# Altium PCB LimeSDR_Mini_1v2_Rounded_panel.PcbDoc
Units mm, origin at the board's own origin, x right, y up, seen from the top; angles counter-clockwise.
Board outline 89.4 x 170.68 mm, 8 copper layers (Top, L2, L3, L4, L5, L6, L7, Bottom), stack 1.129 mm thick; 8 components, 247 nets, 8 pads, 0 vias.
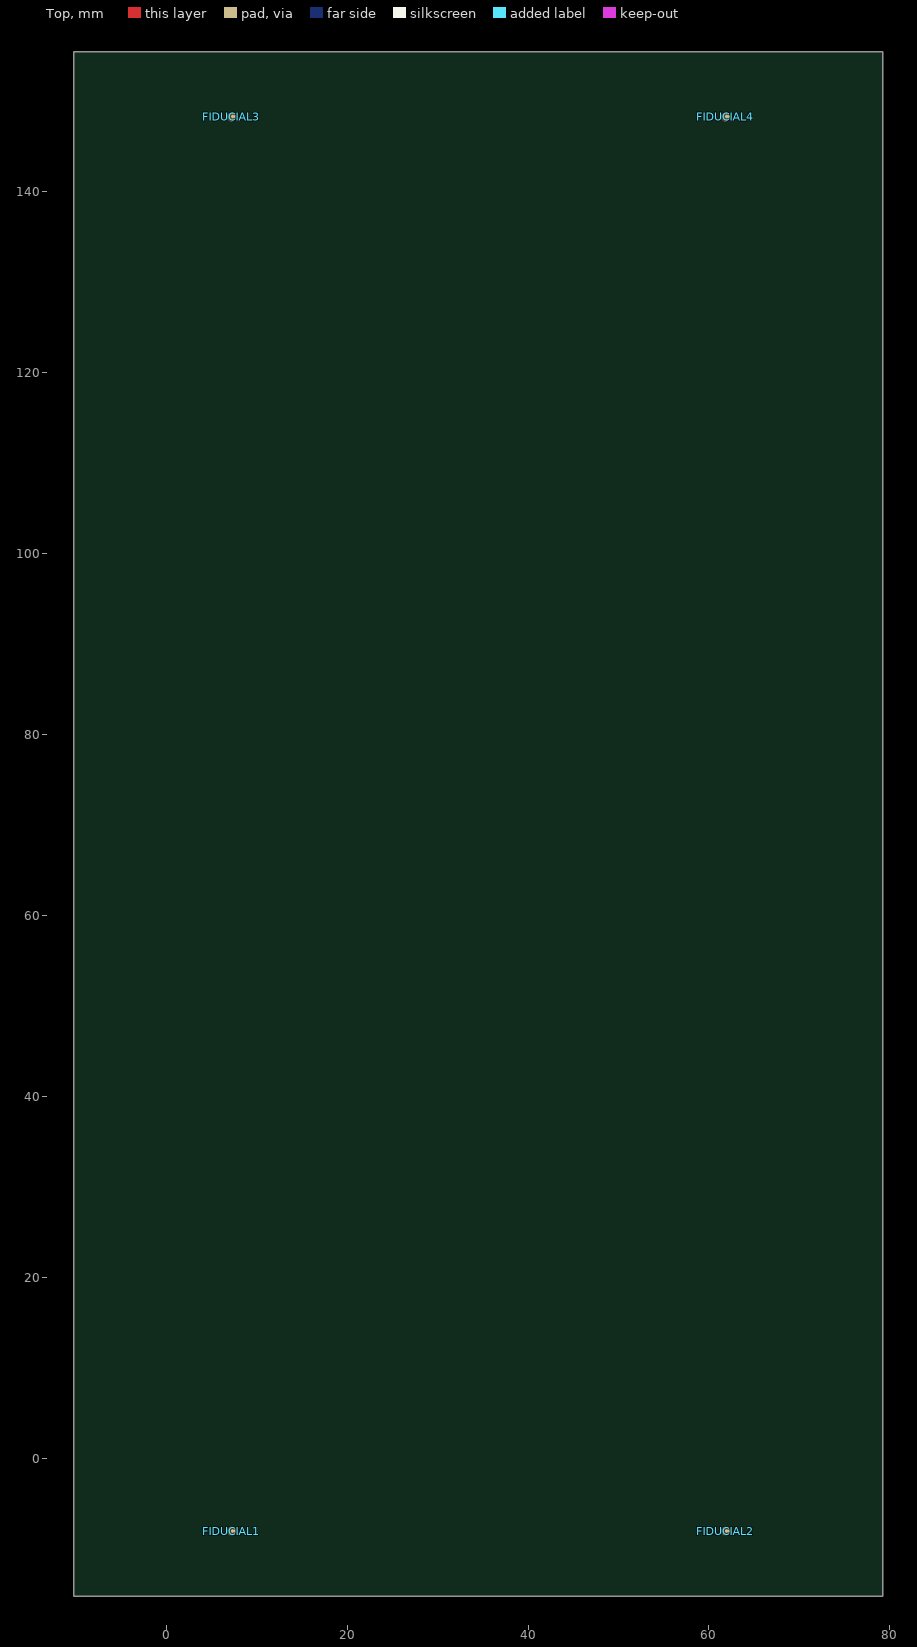
[diagram p0: Top view]
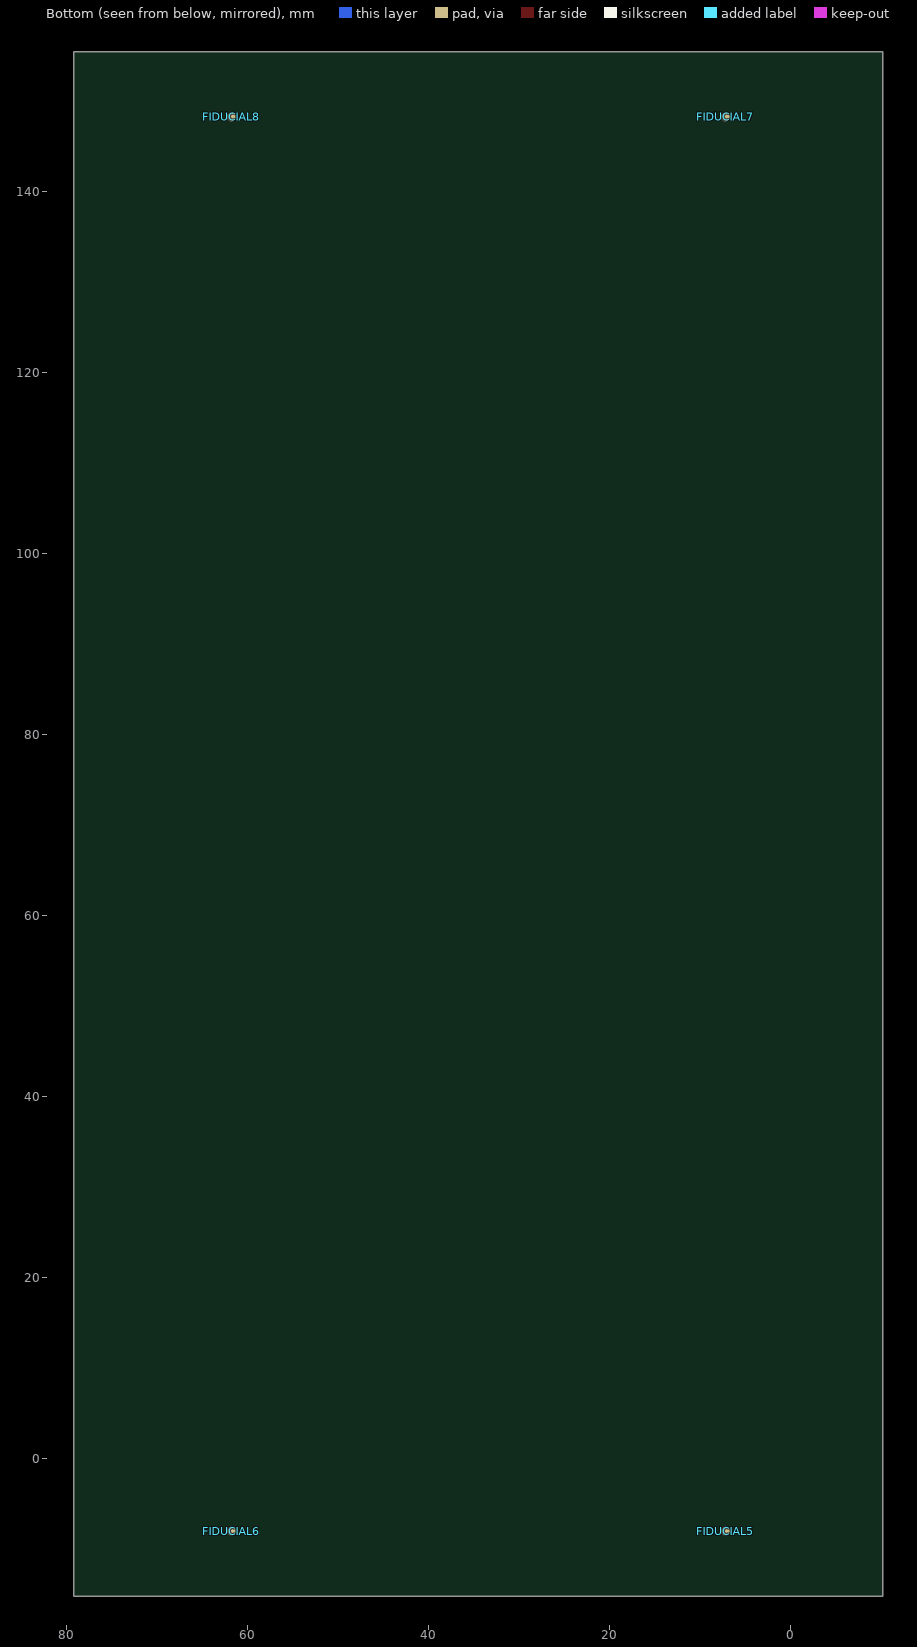
[diagram p1: Bottom view, seen from below]

## Layer stack, top to bottom
TopSolder: solder mask 0.0102, Solder Resist, Dk 3.5
Top: signal copper 0.0178
Dielectric1: core 0.17, FR-4, Dk 4.8
L2: signal copper 0.0356
Dielectric2: prepreg 0.1, FR-4, Dk 4.2
L3: signal copper 0.03
Dielectric3: core 0.1, FR-4, Dk 4.2
L4: signal copper 0.034
Dielectric 4: prepreg 0.1, Dk 4.2
L5: signal copper 0.03
Dielectric 10: core 0.09, Dk 4.2
L6: signal copper 0.03
Dielectric 11: prepreg 0.09, Dk 4.2
L7: signal copper 0.03
Dielectric 8: core 0.254, Dk 4.2
Bottom: signal copper 0.0178
BottomSolder: solder mask 0.0102, Solder Resist, Dk 3.5

## Board outline
-10.2,-15.2 -10.2,155.48 79.2,155.48 79.2,-15.2

## Design rules (kind name [scope] priority, off if disabled: settings)
BoardOutlineClearance [All] p1: gap=0.3
Clearance [All] p1: gap=0.1
ComponentClearance ComponentClearance_RF_CONNECTORS [InComponent('J1') or InComponent('J2') or InComponent('J3') or InComponent('J4') or InComponent('P1') or InComponent('P2') or InComponent('P3') or InComponent('P4') or InComponent('P5') or InComponent('P6') vs InComponent('J1') or InComponent('J2') or InComponent('J3') or InComponent('J4') or InComponent('P1') or InComponent('P2') or InComponent('P3') or InComponent('P4') or InComponent('P5') or InComponent('P6')] p1: gap=-1 collisioncheckmode=3 verticalgap=2540 showdistances=FALSE
ComponentClearance [All] p2: gap=0.01 collisioncheckmode=3 verticalgap=0.254 showdistances=FALSE
DiffPairsRouting DiffPairsRouting_USB3 [InNetClass('FX3_DATA')] p1: maxlimit=0.3 minlimit=0.1 mostfreqgap=0.14 toplayer_minwidth=0.2 toplayer_maxwidth=0.2 toplayer_prefwidth=0.2 midlayer1_minwidth=0.2 midlayer1_maxwidth=0.2 midlayer1_prefwidth=0.2 midlayer2_minwidth=0.2 midlayer2_maxwidth=0.2 midlayer2_prefwidth=0.2 midlayer3_minwidth=0.2 midlayer3_maxwidth=0.2 midlayer3_prefwidth=0.2 midlayer4_minwidth=0.2 midlayer4_maxwidth=0.2 midlayer4_prefwidth=0.2 midlayer7_minwidth=0.2 midlayer7_maxwidth=0.2 midlayer7_prefwidth=0.2 midlayer9_minwidth=0.2 midlayer9_maxwidth=0.2 midlayer9_prefwidth=0.2 bottomlayer_minwidth=0.2 bottomlayer_maxwidth=0.2 bottomlayer_prefwidth=0.2 maxuncoupledlength=12.7
DiffPairsRouting DiffPairsRouting_USB3_XTAL [InNet('FX3_XTAL_N') or InNet('FX3_XTAL_P')] p2: maxlimit=0.2 minlimit=0.1 mostfreqgap=0.1 toplayer_minwidth=0.1 toplayer_maxwidth=0.4 toplayer_prefwidth=0.1 midlayer1_minwidth=0.1 midlayer1_maxwidth=0.4 midlayer1_prefwidth=0.1 midlayer2_minwidth=0.1 midlayer2_maxwidth=0.4 midlayer2_prefwidth=0.1 midlayer3_minwidth=0.1 midlayer3_maxwidth=0.4 midlayer3_prefwidth=0.1 midlayer4_minwidth=0.1 midlayer4_maxwidth=0.4 midlayer4_prefwidth=0.1 midlayer7_minwidth=0.1 midlayer7_maxwidth=0.4 midlayer7_prefwidth=0.1 midlayer9_minwidth=0.1 midlayer9_maxwidth=0.4 midlayer9_prefwidth=0.1 bottomlayer_minwidth=0.1 bottomlayer_maxwidth=0.4 bottomlayer_prefwidth=0.1 maxuncoupledlength=0.2
DiffPairsRouting DiffPairsRouting_TX_RF [InNetClass('TX_RF')] p3: maxlimit=0.14 minlimit=0.14 mostfreqgap=0.14 toplayer_minwidth=0.2 toplayer_maxwidth=0.2 toplayer_prefwidth=0.2 midlayer1_minwidth=0.2 midlayer1_maxwidth=0.2 midlayer1_prefwidth=0.2 midlayer2_minwidth=0.2 midlayer2_maxwidth=0.2 midlayer2_prefwidth=0.2 midlayer3_minwidth=0.2 midlayer3_maxwidth=0.2 midlayer3_prefwidth=0.2 midlayer4_minwidth=0.2 midlayer4_maxwidth=0.2 midlayer4_prefwidth=0.2 midlayer7_minwidth=0.2 midlayer7_maxwidth=0.2 midlayer7_prefwidth=0.2 midlayer9_minwidth=0.2 midlayer9_maxwidth=0.2 midlayer9_prefwidth=0.2 bottomlayer_minwidth=0.2 bottomlayer_maxwidth=0.2 bottomlayer_prefwidth=0.2 maxuncoupledlength=0.2
DiffPairsRouting DiffPairsRouting_RX_RF [InNetClass('RX_RF')] p4: maxlimit=0.3 minlimit=0.1 mostfreqgap=0.14 toplayer_minwidth=0.1 toplayer_maxwidth=0.3 toplayer_prefwidth=0.2 midlayer1_minwidth=0.1 midlayer1_maxwidth=0.3 midlayer1_prefwidth=0.2 midlayer2_minwidth=0.1 midlayer2_maxwidth=0.3 midlayer2_prefwidth=0.2 midlayer3_minwidth=0.1 midlayer3_maxwidth=0.3 midlayer3_prefwidth=0.2 midlayer4_minwidth=0.1 midlayer4_maxwidth=0.3 midlayer4_prefwidth=0.2 midlayer7_minwidth=0.1 midlayer7_maxwidth=0.3 midlayer7_prefwidth=0.2 midlayer9_minwidth=0.1 midlayer9_maxwidth=0.3 midlayer9_prefwidth=0.2 bottomlayer_minwidth=0.1 bottomlayer_maxwidth=0.3 bottomlayer_prefwidth=0.2 maxuncoupledlength=0.2
DiffPairsRouting [All] p5: maxlimit=0.3 minlimit=0.1 mostfreqgap=0.1 toplayer_minwidth=0.1 toplayer_maxwidth=0.5 toplayer_prefwidth=0.2 midlayer1_minwidth=0.1 midlayer1_maxwidth=0.5 midlayer1_prefwidth=0.2 midlayer2_minwidth=0.1 midlayer2_maxwidth=0.5 midlayer2_prefwidth=0.2 midlayer3_minwidth=0.1 midlayer3_maxwidth=0.5 midlayer3_prefwidth=0.2 midlayer4_minwidth=0.1 midlayer4_maxwidth=0.5 midlayer4_prefwidth=0.2 midlayer7_minwidth=0.1 midlayer7_maxwidth=0.5 midlayer7_prefwidth=0.2 midlayer9_minwidth=0.1 midlayer9_maxwidth=0.5 midlayer9_prefwidth=0.2 bottomlayer_minwidth=0.1 bottomlayer_maxwidth=0.5 bottomlayer_prefwidth=0.2 maxuncoupledlength=12.7
FabricationTestPointUsage TestPointUsage [All] p1: valid=0 allowmultiple=FALSE
FabricationTestpoint Testpoint [All] p1: side=3 testpointundercomponent=TRUE minsize=1.016 maxsize=2.54 preferedsize=1.524 minholesize=0.508 maxholesize=1.016 preferedholesize=0.813 testpointgrid=0.025 allowsidetop=TRUE allowsidebottom=TRUE usegrid=TRUE gridtolerance=0
Height "PCI Express, Page 84, \"Component Height Constraints\" for solder side" [OnBottomLayer] p1: minheight=0 maxheight=2.67 prefheight=2.67
Height "PCI Express, Page 84, \"Component Height Constraints\" for component side" [OnTopLayer] p2: minheight=0 maxheight=14.47 prefheight=14.47
HoleSize [All] p1: absolutevalues=TRUE maxlimit=10 minlimit=0.2 maxpercent=80.000 minpercent=20.000
HoleToHoleClearance [All] p1: gap=0.15 allowstackedmicrovias=TRUE
MatchedLengths MatchedLengths_FT_FIFO [InNetClass('FT_FIFO')] p1: tolerance=5 checknetsindiffpair=FALSE checkdiffpairvsdiffpair=TRUE checkxsignals=TRUE checkothers=TRUE
MatchedLengths MatchedLengths_LMS_PORT1 [InNetClass('LMS_PORT1')] p2: tolerance=3.5 checknetsindiffpair=FALSE checkdiffpairvsdiffpair=TRUE checkxsignals=TRUE checkothers=TRUE // tolerance increased due to MCLK being longer
MatchedLengths MatchedLengths_LMS_PORT2 [InNetClass('LMS_PORT2')] p3: tolerance=3.5 checknetsindiffpair=FALSE checkdiffpairvsdiffpair=TRUE checkxsignals=TRUE checkothers=TRUE // tolerance increased due to MCLK being longer
PlaneClearance [All] p1: clearance=0
PolygonConnect PolygonConnect_VCC3P3 [InNetClass('VCC3P3')] p1: connectstyle=Direct reliefconductorwidth=0.254 reliefentries=4 polygonreliefangle="90 Angle" airgapwidth=0.254
PolygonConnect PolygonConnect_GND_VIA [InNet('GND') and isvia] p2: connectstyle=Direct reliefconductorwidth=0.254 reliefentries=4 polygonreliefangle="90 Angle" airgapwidth=0.254
PolygonConnect PolygonConnect_GND [InNet('GND') and (OnTopLayer or OnBottomLayer)] p3: connectstyle=Relief reliefconductorwidth=0.254 reliefentries=4 polygonreliefangle="90 Angle" airgapwidth=0.254
PolygonConnect PolygonConnect_GND_inner [InNet('GND') and not (OnTopLayer or OnBottomLayer)] p4: connectstyle=Direct reliefconductorwidth=0.254 reliefentries=4 polygonreliefangle="90 Angle" airgapwidth=0.254
PolygonConnect PolygonConnect_USB_GND [InNet('USB_GND')] p5: connectstyle=Direct reliefconductorwidth=0.254 reliefentries=4 polygonreliefangle="90 Angle" airgapwidth=0.254
PolygonConnect PolygonConnect_FX3_GND [InNet('FX3_GND')] p6: connectstyle=Direct reliefconductorwidth=0.254 reliefentries=4 polygonreliefangle="90 Angle" airgapwidth=0.254
PolygonConnect PolygonConnect_VCC1P8 [InNet('VCC1P8')] p7: connectstyle=Direct reliefconductorwidth=0.254 reliefentries=4 polygonreliefangle="90 Angle" airgapwidth=0.254
PolygonConnect PolygonConnect_VCC1P8_LMS [InNet('VCC1P8_LMS')] p8: connectstyle=Direct reliefconductorwidth=0.254 reliefentries=4 polygonreliefangle="90 Angle" airgapwidth=0.254
PolygonConnect PolygonConnect_VCC1P8_FX3 [InNet('VCC1P8_FX3')] p9: connectstyle=Direct reliefconductorwidth=0.254 reliefentries=4 polygonreliefangle="90 Angle" airgapwidth=0.254
PolygonConnect PolygonConnect_VDIO_LMS [InNet('VDIO_LMS')] p10: connectstyle=Direct reliefconductorwidth=0.254 reliefentries=4 polygonreliefangle="90 Angle" airgapwidth=0.254
PolygonConnect PolygonConnect_VDIO_LMS_FPGA [InNet('VDIO_LMS_FPGA')] p11: connectstyle=Direct reliefconductorwidth=0.254 reliefentries=4 polygonreliefangle="90 Angle" airgapwidth=0.254
PolygonConnect PolygonConnect_VCC5P0_USB [InNetClass('VCC5P0_USB')] p12: connectstyle=Direct reliefconductorwidth=0.254 reliefentries=4 polygonreliefangle="90 Angle" airgapwidth=0.254
PolygonConnect [All] p13: connectstyle=Relief reliefconductorwidth=0.254 reliefentries=4 polygonreliefangle="90 Angle" airgapwidth=0.254
RoutingVias [All] p1: holewidth=0.2 width=0.4 viastyle="Through Hole" minholewidth=0.2 minwidth=0.35 maxholewidth=4.5 maxwidth=5
ShortCircuit FPGA_L11_PIN [InComponent('IC7') and IsComponentPad and (Name='IC7-L11')] p1: allowed=TRUE // Allow via and track for future connection
ShortCircuit [All] p2: allowed=FALSE
SilkToSilkClearance [All] p1: silktosilkclearance=0.1
SilkToSolderMaskClearance SilkscreenOverComponentPads [IsPad] p1: minsilkscreentomaskgap=0.254 clearancetoexposedcopper=TRUE
SolderMaskExpansion [All] p1: expansion=0.05
Width Width_ClumsyConnection [All] p1: maxlimit=7 minlimit=0.1 preferedwidth=0.2 checkconnectedcopper=TRUE
Width [All] p2: maxlimit=5 minlimit=0.1 preferedwidth=0.2
19 further rules are at their usual default settings.

## Classes and differential pairs
net class VCC3P3A: VCC3P3A
net class VCC5P0_USB: VCC5P0_USB
net class VCC3P3: VCC3P3
net class VCC1P8: VCC1P8
net class VD10_FT: VD10_FT
net class AVDD_FT: AVDD_FT
net class TEST10_LED: FPGA_LED_G FPGA_LED_R
net class TEST8_LMS_I2C: LMS_I2C_SCL LMS_I2C_SDA
net class TEST7_FPGA_GPIO: FPGA_GPIO0 FPGA_GPIO1 FPGA_GPIO2 FPGA_GPIO3 FPGA_GPIO4 FPGA_GPIO5 FPGA_GPIO6 FPGA_GPIO7
net class +3.3V_DIG_LMK: +3.3V_DIG_LMK
net class LMS_MISC: LMS_RXEN LMS_TXNRX1 LMS_TXNRX2
net class LMS_I2C: LMS_I2C_SCL LMS_I2C_SDA
net class FPGA_SPI_LMS: FPGA_SPI_LMS_SS FPGA_SPI_MISO FPGA_SPI_MOSI FPGA_SPI_SCLK NetC1_1 NetIC1_D28 NetIC1_F28 NetIC1_F30
net class LMS_PORT2: LMS_DIQ2_D0 LMS_DIQ2_D1 LMS_DIQ2_D2 LMS_DIQ2_D3 LMS_DIQ2_D4 LMS_DIQ2_D5 LMS_DIQ2_D6 LMS_DIQ2_D7 LMS_DIQ2_D8 LMS_DIQ2_D9 LMS_DIQ2_D10 LMS_DIQ2_D11 LMS_ENABLE_IQSEL2 LMS_FCLK2 LMS_MCLK2
net class LMS_PORT1: LMS_DIQ1_D0 LMS_DIQ1_D1 LMS_DIQ1_D2 LMS_DIQ1_D3 LMS_DIQ1_D4 LMS_DIQ1_D5 LMS_DIQ1_D6 LMS_DIQ1_D7 LMS_DIQ1_D8 LMS_DIQ1_D9 LMS_DIQ1_D10 LMS_DIQ1_D11 LMS_ENABLE_IQSEL1 LMS_MCLK1
net class CLK_PATH: NetC126_1 NetC126_2 NetC127_1 NetC182_1 NetC281_1 NetIC1_AM24 NetIC1_E5 NetIC10_3 NetIC10_5 RXPLL_CLK TXPLL_CLK
component class 06_LMS7002M_Power: C43 C55 C56 C59
net class TX_RF: TXRF1_2AB_N TXRF1_2AB_P TXRF1_2BB_N TXRF1_2BB_P TXRF2_2AB_N TXRF2_2AB_P TXRF2_2BB_N TXRF2_2BB_P
net class RX_RF: RXRF1_LAB_N RXRF1_LAB_P RXRF1_LBB_N RXRF1_LBB_P RXRF2_LAB_N RXRF2_LAB_P RXRF2_LBB_N RXRF2_LBB_P
net class +1.8V_DIG_LMK: +1.8V_DIG_LMK
net class FPGA_GPIO: FPGA_GPIO0 FPGA_GPIO1 FPGA_GPIO2 FPGA_GPIO3 FPGA_GPIO4 FPGA_GPIO5 FPGA_GPIO6 FPGA_GPIO7
net class FPGA_JTAG: FPGA_JTAG_TCK FPGA_JTAG_TDI FPGA_JTAG_TDO FPGA_JTAG_TMS NetJ17_7
net class FT_USB: NetJ6_7 USB_D_N USB_D_P USB_SSRX_N USB_SSRX_P USB_SSTX_N USB_SSTX_P USB_SSTXI_N USB_SSTXI_P
net class VCC1P8_LMS: VCC1P8_LMS
net class VCC3P3_CLK: VCC3P3_CLK
net class FT_FIFO: FT_BE0 FT_BE1 FT_BE2 FT_BE3 FT_CLK FT_D0 FT_D1 FT_D2 FT_D3 FT_D4 FT_D5 FT_D6 FT_D7 FT_D8 FT_D9 FT_D10 FT_D11 FT_D12 FT_D13 FT_D14 FT_D15 FT_D16 FT_D17 FT_D18 FT_D19 FT_D20 FT_D21 FT_D22 FT_D23 FT_D24 FT_D25 FT_D26 FT_D27 FT_D28 FT_D29 FT_D30 FT_D31 FT_OEN FT_RDN FT_TXEN FT_WRN
net class TEST2: LMS_DIQ2_D0 LMS_DIQ2_D1 LMS_DIQ2_D2 LMS_DIQ2_D3 LMS_DIQ2_D4 LMS_DIQ2_D5 LMS_DIQ2_D6 LMS_DIQ2_D7 LMS_DIQ2_D8 LMS_DIQ2_D9 LMS_DIQ2_D10 LMS_DIQ2_D11 LMS_ENABLE_IQSEL2 LMS_MCLK2
net class TEST: LMS_DIQ1_D0 LMS_DIQ1_D1 LMS_DIQ1_D2 LMS_DIQ1_D3 LMS_DIQ1_D4 LMS_DIQ1_D5 LMS_DIQ1_D6 LMS_DIQ1_D7 LMS_DIQ1_D8 LMS_DIQ1_D9 LMS_DIQ1_D10 LMS_DIQ1_D11 LMS_ENABLE_IQSEL1 LMS_MCLK1
net class TEST3: LMS_RXEN LMS_TXEN LMS_TXNRX1 LMS_TXNRX2
net class TEST4: LMS_CORE_LDO_EN LMS_RESET
net class TEST5_FT: FT_D0 FT_D1 FT_D2 FT_D3 FT_D4 FT_D5 FT_D6 FT_D7 FT_D8 FT_D9 FT_D10 FT_D11 FT_D12 FT_D13 FT_D14 FT_D15 FT_D16 FT_D17 FT_D18 FT_D19 FT_D20 FT_D21 FT_D22 FT_D23 FT_D24 FT_D25 FT_D26 FT_D27 FT_D28 FT_D29 FT_D30 FT_D31 NetIC7_A12 NetIC7_B11 NetIC7_B12 NetIC7_B13 NetIC7_C11 NetIC7_C12 NetIC7_C13 NetIC7_D9 NetIC7_D11 NetIC7_D12 NetIC7_E9 NetIC7_E10 NetIC7_E12 NetIC7_F8 NetIC7_F9 NetIC7_F10 NetIC7_F12 NetIC7_G12 NetIC7_G13 NetIC7_H8 NetIC7_H9 NetIC7_H10 NetIC7_H13 NetIC7_J9 NetIC7_J12 NetIC7_J13 NetIC7_K12 NetIC7_L12 NetIC7_L13
net class TEST5_FT_BE: FT_BE0 FT_BE1 FT_BE2 FT_BE3
net class TEST5_FT_STUFF: FT_OEN FT_RDN FT_RESETN FT_RXFN FT_TXEN FT_WAKEUPN FT_WRN
net class TEST6_FPGA_SPI: FPGA_SPI_DAC_SS FPGA_SPI_LMS_SS FPGA_SPI_MISO FPGA_SPI_MOSI FPGA_SPI_SCLK
net class VDIO_LMS: VDIO_LMS
differential pair FT_XTAL: +FT_XTAL_P -FT_XTAL_N
differential pair TXRF2_2AB: +TXRF2_2AB_P -TXRF2_2AB_N
differential pair TXRF2_1BB: +TXRF2_2BB_P -TXRF2_2BB_N
differential pair RXRF2_LBB: +RXRF2_LBB_P -RXRF2_LBB_N
differential pair RXRF2_LAB: +RXRF2_LAB_P -RXRF2_LAB_N
differential pair TXRF1_2BB: +TXRF1_2BB_P -TXRF1_2BB_N
differential pair TXRF1_2AB: +TXRF1_2AB_P -TXRF1_2AB_N
differential pair RXRF1_LBB: +RXRF1_LBB_P -RXRF1_LBB_N
differential pair RXRF1_LAB: +RXRF1_LAB_P -RXRF1_LAB_N
differential pair USB_D: +USB_D_P -USB_D_N
differential pair USB_SSRX: +USB_SSRX_P -USB_SSRX_N
differential pair USB_SSTXI: +USB_SSTXI_P -USB_SSTXI_N
differential pair USB_SSTX: +USB_SSTX_P -USB_SSTX_N

## Components (designator, comment, footprint, x,y, rotation, side; value= is the part's Value field where it differs from the comment)
FIDUCIAL1 "Comment" FIDUCIAL 7.2,-8 r90 top
FIDUCIAL2 "Comment" FIDUCIAL 61.8,-8 r90 top
FIDUCIAL3 "Comment" FIDUCIAL 7.2,148.28 r270 top
FIDUCIAL4 "Comment" FIDUCIAL 61.8,148.28 r270 top
FIDUCIAL5 "Comment" FIDUCIAL 7.2,-8 r90 bottom
FIDUCIAL6 "Comment" FIDUCIAL 61.8,-8 r90 bottom
FIDUCIAL7 "Comment" FIDUCIAL 7.2,148.28 r270 bottom
FIDUCIAL8 "Comment" FIDUCIAL 61.8,148.28 r270 bottom

## Footprints (in the part's own frame and the unit in brackets; to place one, negate y for a bottom-side part, rotate by r counter-clockwise, add the part's x,y. Pads: shape width x height; smd on the part's side, far side on the other; paste and mask are expansions set on the pad)
FIDUCIAL [mm]
  round 1 smd paste-1 mask+1: 1(0,0)

## Nets (pads, with @x,y where several pads share a name; then routed paths per layer and width w, separated by ;. In a path a pad name is that pad's centre, name@x,y a point inside that pad or via, vN(x,y) a via of type N, cw(c..) or ccw(c..) an arc to the next point about the centre after c; other vN are vias at no path point)
+1.8V_DIG_LMK: 
+3.3V_DIG_LMK: 
AVDD_FT: 
EN_VCC3P3: 
FPGA_CONFIG_SEL: 
FPGA_GPIO0: 
FPGA_GPIO1: 
FPGA_GPIO2: 
FPGA_GPIO3: 
FPGA_GPIO4: 
FPGA_GPIO5: 
FPGA_GPIO6: 
FPGA_GPIO7: 
FPGA_I2C_SCL: 
FPGA_I2C_SDA: 
FPGA_JTAG_TCK: 
FPGA_JTAG_TDI: 
FPGA_JTAG_TDO: 
FPGA_JTAG_TMS: 
FPGA_LED_G: 
FPGA_LED_R: 
FPGA_SPI_DAC_SS: 
FPGA_SPI_LMS_SS: 
FPGA_SPI_MISO: 
FPGA_SPI_MOSI: 
FPGA_SPI_SCLK: 
FT_BE0: 
FT_BE1: 
FT_BE2: 
FT_BE3: 
FT_CLK: 
FT_D0: 
FT_D1: 
FT_D2: 
FT_D3: 
FT_D4: 
FT_D5: 
FT_D6: 
FT_D7: 
FT_D8: 
FT_D9: 
FT_D10: 
FT_D11: 
FT_D12: 
FT_D13: 
FT_D14: 
FT_D15: 
FT_D16: 
FT_D17: 
FT_D18: 
FT_D19: 
FT_D20: 
FT_D21: 
FT_D22: 
FT_D23: 
FT_D24: 
FT_D25: 
FT_D26: 
FT_D27: 
FT_D28: 
FT_D29: 
FT_D30: 
FT_D31: 
FT_GPIO0: 
FT_GPIO1: 
FT_OEN: 
FT_RDN: 
FT_RESETN: 
FT_RXFN: 
FT_SIWUN: 
FT_TXEN: 
FT_VBUS: 
FT_WAKEUPN: 
FT_WRN: 
FT_XTAL_N: 
FT_XTAL_P: 
GND: 
LM75_OS: 
LMK_CLK: 
LMS_CORE_LDO_EN: 
LMS_DIQ1_D0: 
LMS_DIQ1_D1: 
LMS_DIQ1_D2: 
LMS_DIQ1_D3: 
LMS_DIQ1_D4: 
LMS_DIQ1_D5: 
LMS_DIQ1_D6: 
LMS_DIQ1_D7: 
LMS_DIQ1_D8: 
LMS_DIQ1_D9: 
LMS_DIQ1_D10: 
LMS_DIQ1_D11: 
LMS_DIQ2_D0: 
LMS_DIQ2_D1: 
LMS_DIQ2_D2: 
LMS_DIQ2_D3: 
LMS_DIQ2_D4: 
LMS_DIQ2_D5: 
LMS_DIQ2_D6: 
LMS_DIQ2_D7: 
LMS_DIQ2_D8: 
LMS_DIQ2_D9: 
LMS_DIQ2_D10: 
LMS_DIQ2_D11: 
LMS_ENABLE_IQSEL1: 
LMS_ENABLE_IQSEL2: 
LMS_FCLK1: 
LMS_FCLK2: 
LMS_I2C_SCL: 
LMS_I2C_SDA: 
LMS_MCLK1: 
LMS_MCLK2: 
LMS_RESET: 
LMS_RXEN: 
LMS_TXEN: 
LMS_TXNRX1: 
LMS_TXNRX2: 
NetC1_1: 
NetC7_1: 
NetC7_2: 
NetC8_1: 
NetC8_2: 
NetC9_1: 
NetC9_2: 
NetC10_1: 
NetC10_2: 
NetC11_1: 
NetC13_1: 
NetC15_1: 
NetC17_1: 
NetC19_1: 
NetC21_1: 
NetC23_1: 
NetC29_1: 
NetC30_1: 
NetC31_1: 
NetC32_1: 
NetC33_1: 
NetC34_1: 
NetC35_1: 
NetC36_2: 
NetC37_1: 
NetC38_1: 
NetC39_1: 
NetC40_1: 
NetC41_1: 
NetC42_1: 
NetC43_1: 
NetC44_2: 
NetC45_2: 
NetC46_1: 
NetC47_1: 
NetC48_1: 
NetC49_1: 
NetC50_1: 
NetC51_1: 
NetC52_1: 
NetC53_1: 
NetC54_1: 
NetC55_1: 
NetC56_1: 
NetC57_2: 
NetC58_1: 
NetC59_1: 
NetC60_1: 
NetC61_1: 
NetC62_1: 
NetC63_1: 
NetC64_1: 
NetC65_1: 
NetC66_1: 
NetC67_1: 
NetC102_1: 
NetC126_1: 
NetC126_2: 
NetC127_1: 
NetC128_2: 
NetC131_2: 
NetC144_1: 
NetFR17_1: 
NetIC1_AM24: 
NetIC1_D28: 
NetIC1_E5: 
NetIC1_F18: 
NetIC1_F28: 
NetIC1_F30: 
NetIC7_B9: 
NetIC7_C4: 
NetIC7_C5: 
NetIC7_D8: 
NetIC7_E5: 
NetIC7_E7: 
NetIC7_J10: 
NetIC7_K10: 
NetIC8_27: 
NetIC10_3: 
NetIC10_5: 
NetIC10_24: 
NetIC12_11: 
NetIC13_10: 
NetIC13_11: 
NetJ6_7: 
NetJ7_2: 
NetLED1_C1: 
NetLED1_C2: 
NetMN1_1: 
NetMN2_1: 
NetMN3_1: 
NetMN4_1: 
PG_VCC1P8: 
RXPLL_CLK: 
RXRF1_LAB_N: 
RXRF1_LAB_P: 
RXRF1_LBB_N: 
RXRF1_LBB_P: 
RXRF2_LAB_N: 
RXRF2_LAB_P: 
RXRF2_LBB_N: 
RXRF2_LBB_P: 
TCXO_VC: 
TXPLL_CLK: 
TXRF1_2AB_N: 
TXRF1_2AB_P: 
TXRF1_2BB_N: 
TXRF1_2BB_P: 
TXRF2_2AB_N: 
TXRF2_2AB_P: 
TXRF2_2BB_N: 
TXRF2_2BB_P: 
USB_D_N: 
USB_D_P: 
USB_GND: 
USB_SSRX_N: 
USB_SSRX_P: 
USB_SSTX_N: 
USB_SSTX_P: 
USB_SSTXI_N: 
USB_SSTXI_P: 
USB_VBUS: 
VCC1P8: 
VCC1P8_LMS: 
VCC3P3: 
VCC3P3_CLK: 
VCC3P3A: 
VCC5P0_USB: 
VD10_FT: 
VDIO_LMS: 
pads on no net: FIDUCIAL1.1 FIDUCIAL2.1 FIDUCIAL3.1 FIDUCIAL4.1 FIDUCIAL5.1 FIDUCIAL6.1 FIDUCIAL7.1 FIDUCIAL8.1

## Silkscreen, mask and mechanical layers (free items; w line width, h text height)
Mechanical1:
  drawing of 2483 lines, arcs and shapes, not listed
  text "LimeSDR Mini 1v2" at 144.943,211.522 h2.6
  text "CONTROLLED IMPEDANCE" at 128.075,206.5 h3
  text "GENERAL PARAMETERS:" at 105.025,200.8 h1.5
  text "V-Score parameters" at 8.075,194.35 h1.5
  text "30 deg" at 13.1,190.375 h1.5
  text "Top layer copper foil thickness: 17.5 um / Dielectric thickness from Top to L2 = 173um (6.8 mils) / Dielectric between Top layer and 2nd layer relative permittivity (Er): 4.2" at 108.475,189.175 h1.5
  text "CALCULATIONS:" at 105.5,185.475 h1.5
  text "0.6mm" at -3.2,180.55 h1.5
  text "0.4mm" at -3.2,177.8 h1.5
  text "1.6mm +/-10%" at 35.05,177.55 h1.5
  text "0.6mm" at -3.2,175.05 h1.5
  text "RF (Top)" at 89.65,168.025 h2
  text "V-Score to be run following the marked (0.25 mm width) lines as shown on the narrow side of each board." at -3.2,165.5 h1.5
  text "50 Ohm coplanar waveguide (Top layer, without GND) characteristics: /  Top layer copper foil thickness: 17.5 um /  Track width = 0.309 mm (12.165 mils) /  Dielectric thickness from Top to L2 = 173um (6.8 mils) /  Dielectric between Top layer and 2nd layer relative permittivity (Er): 4.2 /          /  Approximate microstrip line impedance = 49.99 Ohms (+/- 10% tolerance)" at 109,159.325 h1.5
  text "Board cutout" at 25.9,156.7 h1.5
  text "Cutout" at 31.2,141.7 h1.5
  text "Cutout" at 1.3,140.9 h0.7 r90
  text "Cutout" at 68.6,140.9 h0.7 r90
  text "RF (Top)" at 89.65,140.025 h2
  text "100 Ohm coplanar differential pair (Top layer, without GND) characteristics: /  Top layer copper foil thickness: 17.5 um /  Track width = 0.2 mm (7.874 mils) /  Track spacing = 0.14 mm (5.511 mils) /  Track width/spacing ratio = 1.43 /  Dielectric thickness from top to L2 = 173um (6.8 mils) /  Dielectric between Top layer and 2nd layer relative permittivity (Er): 4.2 /          /  Approximate coupled microstrip line impedance = 100.6 Ohms (+/- 10% tolerance)" at 109.425,129.9 h1.5
  text "USB3.0 (Top)" at 85.25,114.625 h2
  text "Cutout" at 31.05,105.5 h1.5
  text "Cutout" at 1.3,104.6 h0.7 r90
  text "Cutout" at 68.6,104.6 h0.7 r90
  text "90 Ohm coupled microstrip line (Top layer, without GND) characteristics: /  Top layer copper foil thickness: 17.5 um /  Track width = 0.2 mm (7.874 mils) /  Track spacing = 0.1 mm (3.93 mils) /  Track width/spacing ratio = 2 /  Dielectric thickness from Top to 2nd layer = 173um (6.8 mils) /  Dielectric between Top layer and 2nd layer relative permittivity (Er): 4.2 /          /  Approximate coupled microstrip line impedance = 90.5 Ohms (+/- 10% tolerance)" at 108.325,100.725 h1.5
  text "USB3.0 (Bottom)" at 81.05,86.65 h2
  text "90 Ohm coupled microstrip line (Bottom layer, without GND) characteristics: /  Bottom layer copper foil thickness: 17.5 um /  Track width = 0.2 mm (7.874 mils) /  Track spacing = 0.1 mm (3.93 mils) /  Track width/spacing ratio = 2 /  Dielectric thickness from Bottom to 7th layer = 173um (6.8 mils) /  Dielectric between Bottom layer and 7th layer relative permittivity (Er): 4.2 /          /  Approximate coupled microstrip line impedance = 90.5 Ohms (+/- 10% tolerance)" at 108.375,72.75 h1.5
  text "Cutout" at 31.2,69.075 h1.5
  text "Cutout" at 1.3,68.3 h0.7 r90
  text "Cutout" at 68.6,68.3 h0.7 r90
  text "VERY IMPORTANT NOTES:" at 128.675,67.5 h3
  text "Cutout" at 32.05,32.5 h1.5
  text "Cutout" at 1.4,32.1 h0.7 r90
  text "Cutout" at 68.7,32.1 h0.7 r90
  text "1) All 0.2mm vias including 0.35mm ring and 0.2mm drill via-in-pads (IC1) must be resin filled with metal cap / 2) IC1 thermal pad vias with 0.4mm ring and 0.2mm drill must be resin filled with metal cap. /    IC1 thermal pad vias  with 0.5mm ring and 0.2mm drill must be left open (NO resin fill with metal cap). 4 vias in total, marked with note / 3) Solder mask : DARK BLUE, both sides, halogen free, glossy finish (NOT matte) / 4) Silkscreen : white epoxy ink, halogen free, both sides. No silkscreen on pads. / 5) DRCs must be run on Gerber files before building boards / 6) Hole diameters are final manufactured diameters INCLUDING HOLE METALIZATION. / 7) Minimum track spacing: 0.1 mm /    Minimum track width: 0.1 mm / 8) There are plated and non-plated holes on the PCB / 9) Material: /    - IT-180A /    - PCB vendor to silkscreen UL and RoHS compliance marks, vendor logo and date code on bottom  /      where shown (ignore if none of the info will be placed on PCB) /    - Copper weight:  External layers 0.5 oz+plating /                      Internal layers 1 oz / 10) Electrical test : 100 % netlist. / 11) Boards are to be individually bagged. / 12) Assembly note: Assembly house MUST provide notes in paper with shipped board if there were any changes  /     during assembly and the board is not assembled 100% according to BOM and P&P files. Note example:" at 107.075,6.925 h1.5
  text "Part" at 115.95,1.375 h1.5
  text "Initial BOM asm. note" at 125.95,1.375 h1.5
  text "Status on board" at 160.95,1.375 h1.5
  text "Comment" at 203.95,1.375 h1.5
  text "Cutout" at 31.275,-3.625 h1.5
  text "R1" at 117.45,-3.625 h1.5
  text "FIT" at 136.95,-3.625 h1.5
  text "NF" at 170.45,-3.625 h1.5
  text "Not mounted due to bad footprint" at 187.95,-4.125 h1.5
  text "Cutout" at 1.3,-4.3 h0.7 r90
  text "Cutout" at 68.6,-4.3 h0.7 r90
  text "IC5" at 116.95,-6.625 h1.5
  text "FIT" at 136.95,-6.625 h1.5
  text "NF" at 170.45,-7.125 h1.5
  text "Not mounted due to part shortage" at 187.95,-7.625 h1.5
  text "TH via" at 200.15,-16.8 h1.52
  text "STACKUP:" at 108.65,-17.175 h3
  text "GERBER LAYER NAMES:" at 74.75,-18.15 h1.52
  text "Top-Bot" at 199.65,-19.175 h1.52
  text "GTP" at 74.85,-20.875 h1.52
  text "Top solder paste" at 79.95,-20.975 h1
  text "GTO" at 74.85,-23.875 h1.52
  text "Silkscreen" at 79.85,-24.175 h1
  text "ELECTRICAL LAYERS:" at 214.15,-25.175 h1.52
  text "Assembly TOP Info: Shield orientation on board" at 0.175,-25.975 h1.5
  text "Assembly TOP Info: FAN mounting" at -59,-26 h1.5
  text "GTS" at 74.85,-26.375 h1.52
  text "Soldermask (halogen free)" at 79.85,-27.675 h1
  text "GTL" at 74.85,-28.875 h1.52
  text "Top: RF/GND" at 213.85,-28.875 h1.52
  text "0.5oz+plating" at 79.85,-29.375 h1
  text "PP" at 102.15,-31.675 h1
  text "6.8mil" at 105.875,-31.75 h1
  text "WE" at 25.425,-33.175 h2
  text "WE" at 47.425,-33.175 h2
  text "G1" at 74.85,-33.375 h1.52
  text "L2: GND" at 214.35,-33.375 h1.52
  text "1oz" at 79.85,-33.575 h1
  text "CORE" at 102.15,-36.175 h1
  text "G2" at 74.85,-37.875 h1.52
  text "L3: PWR/GND" at 214.35,-37.875 h1.52
  text "1oz" at 79.85,-38.075 h1
  text "USB" at 3.425,-38.975 h1.5
  text "USB" at -67.875,-39.075 h1.5
  text "PP" at 102.15,-40.675 h1
  text "30mm FAN" at -48.8,-41 h2
  text "G3" at 74.85,-42.375 h1.52
  text "L4: Signal/PWR/GND" at 214.35,-42.375 h1.52
  text "1oz" at 79.85,-42.575 h1
  text "CORE" at 102.15,-45.175 h1
  text "G4" at 74.85,-46.875 h1.52
  text "L5: Signal/PWR/GND" at 214.35,-46.875 h1.52
  text "1oz" at 79.85,-47.075 h1
  text "24mm slot center to center" at -50.2,-47.6 h1.2 r90
  text "RF connectors" at 58.425,-47.975 h1.5 r90
  text "RF connectors" at -12.875,-48.075 h1.5 r90
  text "PP" at 102.15,-49.675 h1
  text "G5" at 74.85,-51.375 h1.52
  text "L6: CLK/Signal/GND" at 214.35,-51.375 h1.52
  text "1oz" at 79.85,-51.575 h1
  text "Assembly BOTTOM Info: Shield orientation on board" at 1.3,-53.55 h1.5
  text "J10-FAN supply" at -30.3,-53.7 h2
  text "CORE" at 102.15,-54.175 h1
  text "G6" at 74.85,-55.875 h1.52
  text "1oz" at 79.85,-56.075 h1
  text "L7: GND" at 214.35,-56.375 h1.52
  text "PP" at 102.15,-58.675 h1
  text "6.8mil" at 105.875,-58.75 h1
  text "WE" at 42.225,-59.875 h2
  text "GBL" at 74.85,-60.375 h1.52
  text "Bottom: Signal/PWR/GND" at 214.35,-60.375 h1.52
  text "0.5oz+plating" at 79.85,-60.875 h1
  text "GBS" at 74.85,-62.875 h1.52
  text "FAN stands on: / 2x 50mm M3 hex metal spacers; / 2x 8mm M3 metal screws (FAN side); / 2x 3mm M3 metal screws (PCB bottom side);" at -62.2,-63.1 h1.5
  text "Soldermask (halogen free)" at 79.85,-64.075 h1
  text "ADDITIONAL LAYERS:" at 217.15,-64.675 h1.52
  text "GBO" at 74.85,-65.375 h1.52
  text "Silkscreen" at 79.85,-65.575 h1
  text "USB" at 53.175,-66.375 h1.5
  text "GBP" at 74.85,-68.375 h1.52
  text "Bottom solder paste" at 79.85,-68.575 h1
  text "Mechanical 1: Board cutout" at 219.85,-68.875 h1.52
  text "Via type #1" at 157.375,-71.1 h1.52
  text "ASM TOP: Assembly top" at 219.85,-71.875 h1.52
  text "0.2mm drill / 0.4mm ring" at 198.15,-73.675 h1.2
  text "ASM BOT: Assembly bottom" at 219.85,-74.875 h1.52
  text "Total PCB thicknes:  / 1.6mm +/- 10%" at 74.65,-76.675 h1.52
  text "Mechanical 13: Component 3D body" at 219.85,-77.875 h1.52
  text "0.2mm drill / 0.35mm ring" at 198.15,-79.675 h1.2
  text "Via type #2 (In pad, resin filled with metal cap)" at 156.875,-79.775 h1.52
  text "Single board size: 69 x 31.37 mm2 / Total panel size: 89.4 x 170.68 mm2" at 0.575,-84.025 h1.5
ASM BOT:
  the board outline again, w0.1
  text "Assembly bottom" at 42.075,156.875 h1.25
ASM TOP:
  the board outline again, w0.1
  text "Assembly top" at 27.375,156.775 h1.25

## Dimensions
-10.2,-15.2 to -10.2,155.48 on Mechanical1
0,-15.2 to 69,-15.2 on Mechanical1
2,0 to 2,31.375 on Mechanical1
-10.2,155.48 to 79.2,155.48 on Mechanical1

## Panel: embedded boards
"LimeSDR_Mini_1v2_Rounded.PcbDoc" at 0,0, 4 rows x 1 columns, spacing 36.37 x 67.895, rotation 0